# EAGLE board LaunchFET-iso (EAGLE 6.3)
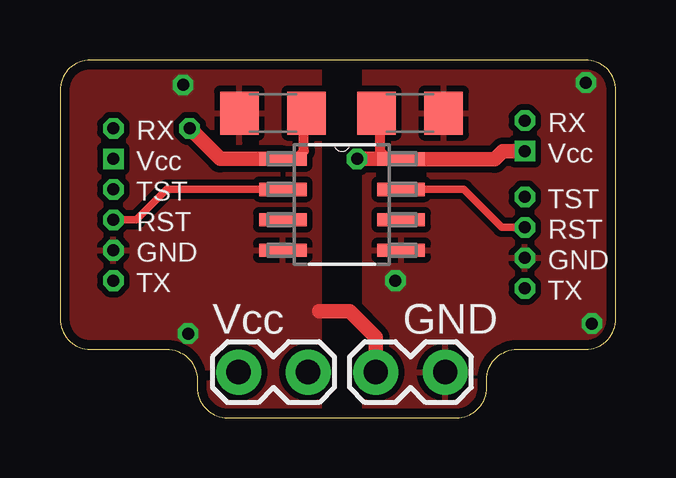
[diagram p0: board, top side]
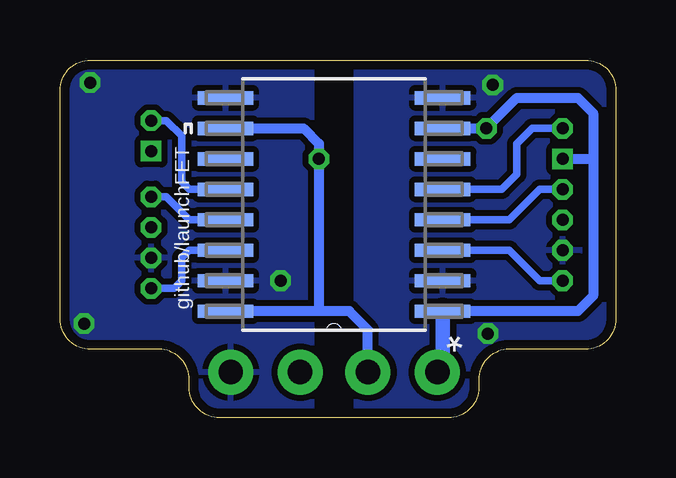
[diagram p1: board, bottom side, seen from below]

Size 23.16 x 14.91 mm. Coordinates in mm from the lower left corner, seen from the top.
Outline: 0,13.64 0,4.13 arc90 1.27,2.86 4.45,2.86 arc-90 5.72,1.59 5.72,1.27 arc90 6.99,0 16.51,0 arc90 17.78,1.27 17.78,1.59 arc-90 19.05,2.86 21.9,2.86 arc90 23.16,4.13 23.16,13.64 arc90 21.9,14.91 1.27,14.91 arc90 0,13.64
Copper layers (1*16): Top 0.0356mm / dielectric 1.5011mm / Bottom 0.0356mm
Design rules "LaenPCBOrder *": minimum track width 6mil, minimum drill 13mil, track to track 6mil, track to pad 6mil, pad to pad 6mil, via to via 6mil, smd to smd 6mil, copper to edge 15mil, drill to drill 6mil, minimum pad ring 7mil, minimum via ring 7mil, stop-mask expansion 4mil, vias tented up to drill 20mil, thermal gap 10mil

## Footprints (pad centres in the part's own frame; a part is rotated, then mirrored left to right if it is on the bottom)
C1206 = smd 1.6 x 1.8: 1 -1.4,0; 2 1.4,0
1X02_LOCK = drill 1.016 pad 1.88: 1 -0.178,0; 2 2.718,0
DW16 = smd 2.311 x 0.559: 1 -4.521,4.445; 2 -4.521,3.175; 3 -4.521,1.905; 4 -4.521,0.635; 5 -4.521,-0.635; 6 -4.521,-1.905; 7 -4.521,-3.175; 8 -4.521,-4.445; 9 4.521,-4.445; 10 4.521,-3.175; 11 4.521,-1.905; 12 4.521,-0.635; 13 4.521,0.635; 14 4.521,1.905; 15 4.521,3.175; 16 4.521,4.445
D8 = smd 1.981 x 0.559: 1 -2.464,1.905; 2 -2.464,0.635; 3 -2.464,-0.635; 4 -2.464,-1.905; 5 2.464,-1.905; 6 2.464,-0.635; 7 2.464,0.635; 8 2.464,1.905
EASYMSP-6PIN = drill 0.5 octagon: GND 0,-1.27; RST 0,0; RX 0,3.81; TST 0,1.27; TX 0,-2.54 | drill 0.5 square: VCC 0,2.54
SAFEMSP-6PIN = drill 0.5 octagon: GND 0,-1.27; RST 0,0; RX 0,4.445; TST 0,1.27; TX 0,-2.54 | drill 0.5 square: VCC 0,3.175

## Placement (x,y rotation side)
C1  [C1206]  14.59,12.7 0 top
C2  [C1206]  8.87,12.7 180 top
JP1  [1X02_LOCK]  7.62,1.91 0 top
JP2  [1X02_LOCK]  15.87,1.91 180 top
U2  ISO7231C_DW_16  [DW16]  11.75,8.89 180 bottom
U$2  ISO1540  [D8]  11.75,8.89 0 top
U$4  6-PIN-ICSPEASY-MSP  [EASYMSP-6PIN]  2.22,8.25 0 top
U$5  6-PIN-ICSPSAFE-MSP  [SAFEMSP-6PIN]  19.37,7.94 0 top

## Library data of the parts
C1 C2 = adafruit
JP1 JP2 = SparkFun-Passives
U2 = TI; DATASHEETURL: http://www.ti.com/lit/gpn/ISO7231C; DESCRIPTION: Triple Channel, 2/1, 25Mbps, Digital Isolator; FAMILY_NAME: ISOLATOR; GENERIC_PART_NUMBER: ISO7231C; INDUSTRY_STD_PKG_TYPE: SOIC; MANUFACTURER: Texas Instruments; MANUFACTURER_PART_NUMBER: iso7231c_dw_16; PACKAGE_DESIGNATOR: DW; PIN_COUNT: 16; VENDOR: Texas Instruments
U$2 = TI
U$4 U$5 = LaunchFET

## Nets
GND_FET: C2.2 JP2.2 U2.2 U2.8 U$2.4 U$4.GND
GND_TARGET: C1.2 JP2.1 U2.9 U2.15 U$2.5 U$5.GND
RESET_FET: U$2.2 U$4.RST
RESET_TARGET: U$2.7 U$5.RST
RX_FET: U2.5 U$4.RX
RX_TARGET: U2.12 U$5.RX
TEST_FET: U2.4 U$4.TST
TEST_TARGET: U2.13 U$5.TST
TX_FET: U2.3 U$4.TX
TX_TARGET: U2.14 U$5.TX
VCC_FET: C2.1 JP1.1 U2.1 U2.7 U$2.1 U$4.VCC
VCC_TARGET: C1.1 JP1.2 U2.10 U2.16 U$2.8 U$5.VCC

## Tracks (layer width: path | path; a pad name or v marks a point on that pad's centre or on a via)
GND_FET  (via drill 0.5)
  Top 0.61: JP2.2 13.16,3.35 12.07,4.45 10.79,4.45
  other vias: 5.13,13.87 5.34,3.51
  pour Bottom (isolate 0.254): 10.79,0.32 10.79,14.61 1.59,14.61 arc90 0.32,13.33 0.32,4.45 arc90 1.59,3.18 4.76,3.18 arc-90 6.03,1.91 6.03,1.59 arc90 7.3,0.32
  pour Top (isolate 0.254): 10.79,0.32 10.79,14.61 1.59,14.61 arc90 0.32,13.33 0.32,4.45 arc90 1.59,3.18 4.76,3.18 arc-90 6.03,1.91 6.03,1.59 arc90 7.3,0.32
GND_TARGET  (via drill 0.5)
  other vias: 13.97,5.71 21.91,13.97 22.16,3.92
  pour Top (isolate 0.254): 12.7,14.61 12.7,0.32 16.19,0.32 arc90 17.46,1.59 17.46,1.91 arc-90 18.73,3.18 21.59,3.18 arc90 22.86,4.45 22.86,13.33 arc90 21.59,14.61
  pour Bottom (isolate 0.254): 12.7,14.61 12.7,0.32 16.19,0.32 arc90 17.46,1.59 17.46,1.91 arc-90 18.73,3.18 21.59,3.18 arc90 22.86,4.45 22.86,13.33 arc90 21.59,14.61
RESET_FET
  Top 0.305: U$4.RST 3.17,8.25 4.45,9.52 U$2.2
RESET_TARGET
  Top 0.305: U$2.7 16.83,9.52 18.41,7.94 U$5.RST
RX_FET
  Bottom 0.305: U$4.RX 3.49,12.07 4.13,11.43 4.13,10.16 4.76,9.52 U2.5
RX_TARGET
  Bottom 0.305: U2.12 17.78,9.52 18.1,9.84 18.1,11.75 18.73,12.38 U$5.RX
TEST_FET
  Bottom 0.305: U$4.TST 3.17,9.52 4.45,8.25 U2.4
TEST_TARGET
  Bottom 0.305: U$5.TST 18.73,9.21 17.78,8.25 U2.13
TX_FET
  Bottom 0.305: U$4.TX 3.17,5.71 4.45,6.98 U2.3
TX_TARGET
  Bottom 0.305: U2.14 17.78,6.98 18.1,6.67 18.1,5.71 18.41,5.4 U$5.TX
VCC_FET  (via drill 0.5)
  Top 0.406: U$2.1 9.84,10.79 10.16,11.11 10.16,12.59 C2.1
  Top 0.61: U$2.1 6.67,10.79 v5.4,12.07
  Bottom 0.406: U2.7 v5.4,12.07 4.13,13.33 1.59,13.33 0.95,12.7 0.95,10.79 | 0.95,10.79 0.95,5.08 1.59,4.45 U2.1 | U$4.VCC 0.95,10.79
  Bottom 0.61: U2.1 7.23,2.12 JP1.1
VCC_TARGET  (via drill 0.5)
  Top 0.406: U$2.8 13.65,10.79 13.33,11.11 13.33,12.07 | 13.33,12.55 C1.1
  Top 0.61: U$5.VCC 18.46,11.11 18.11,10.77 14.26,10.77 | U$2.8 14.24,10.77 14.26,10.77 | 13.33,12.55 13.33,12.07 | v12.38,10.79 14.29,10.79 14.26,10.77
  Bottom 0.406: JP1.2 10.34,3.67 11.11,4.45 12.38,4.45 | 12.38,4.45 U2.16 | U2.10 13.02,12.07 12.38,11.43 v12.38,10.79 12.38,4.45

## Text on the board
tStop: LaunchFET
_tsilk: Vcc | GND
_bsilk: github/launchFET